# Altium PCB ZC-ST4X-A004F(4G).PcbDoc
Units mil, origin at the board's own origin, x right, y up, seen from the top; angles counter-clockwise.
Board outline 1690.91 x 2018.1 mil, 2 copper layers (Top Layer, Bottom Layer); 46 components, 33 nets, 228 pads, 167 vias.
Unrouted connection lines stored in the file: 50.
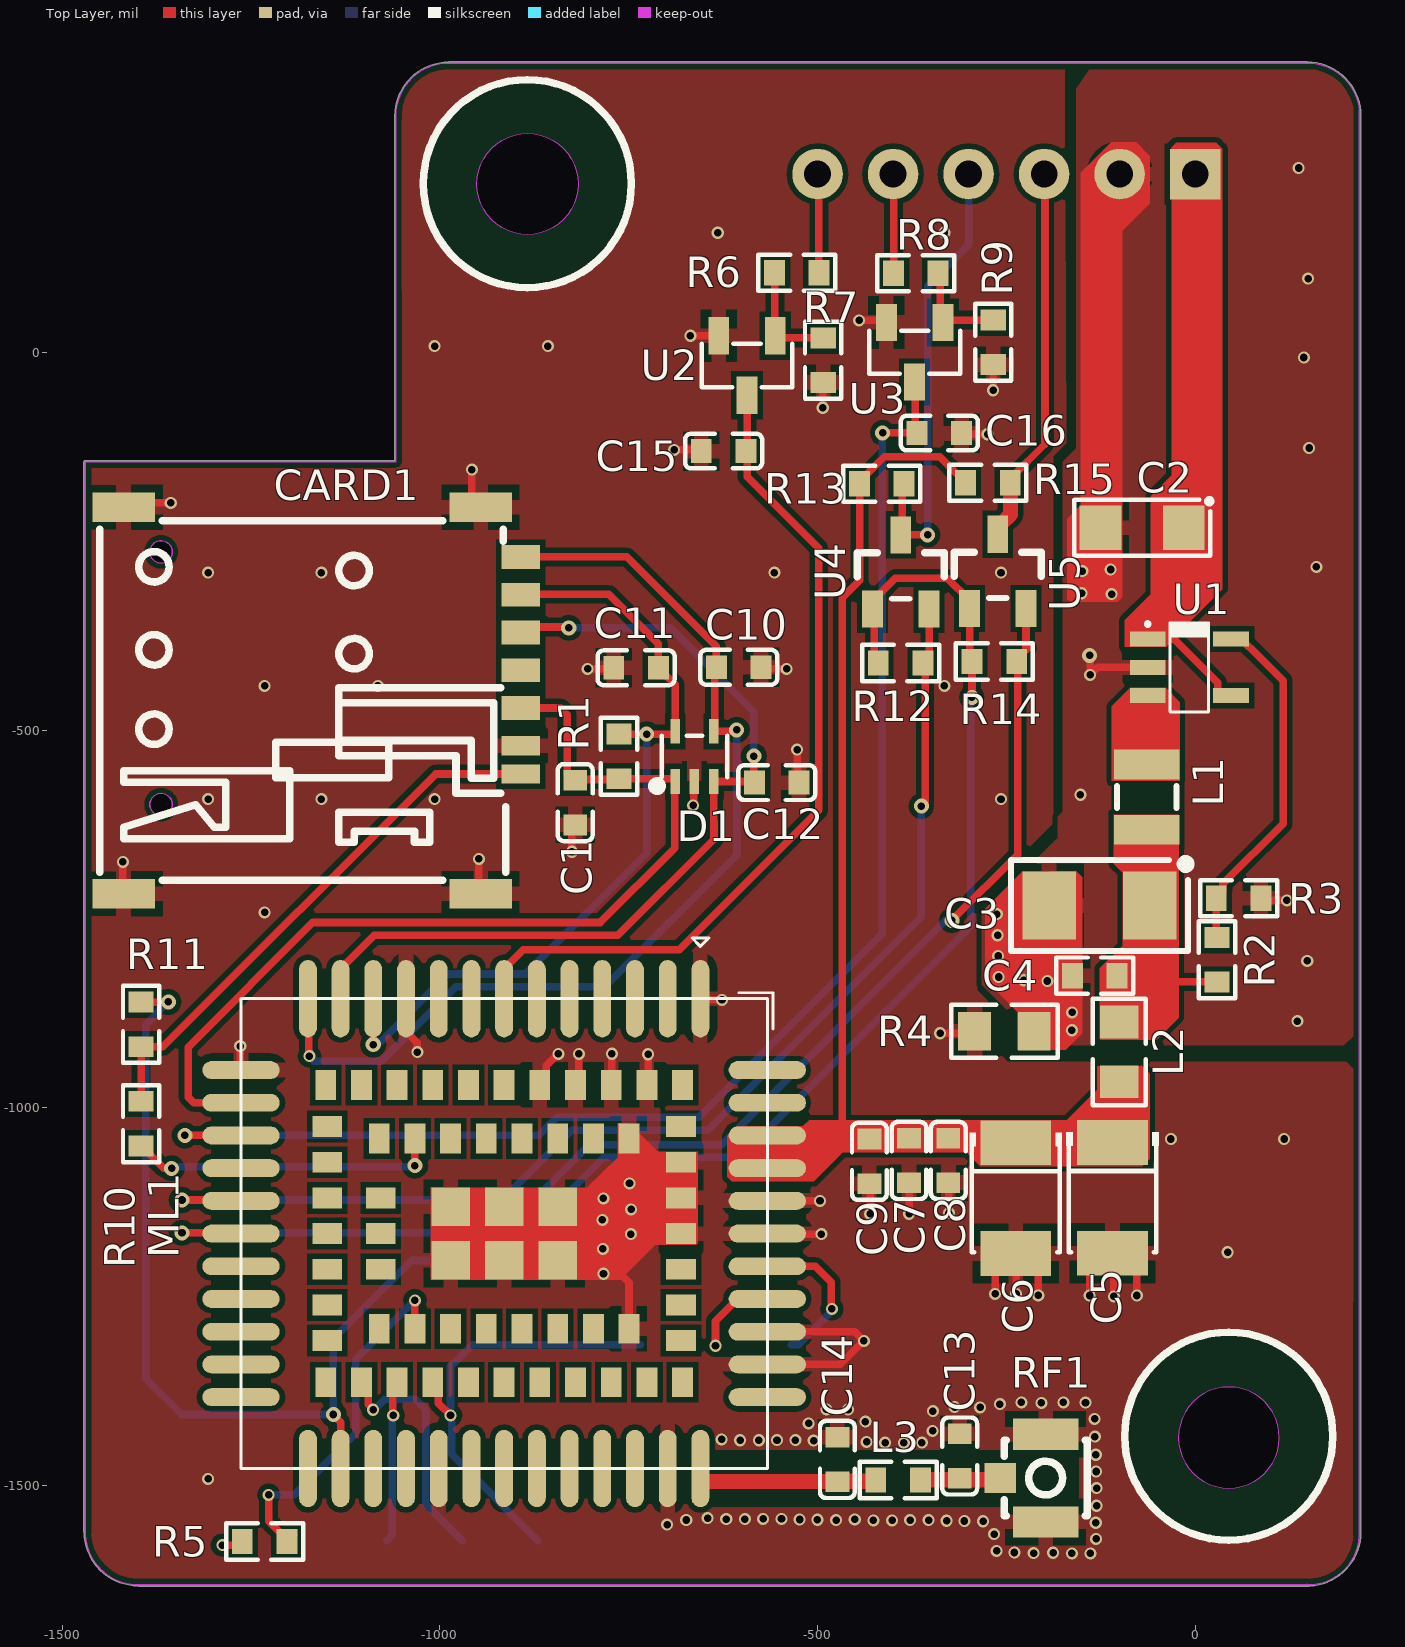
[diagram p0: Top Layer view]
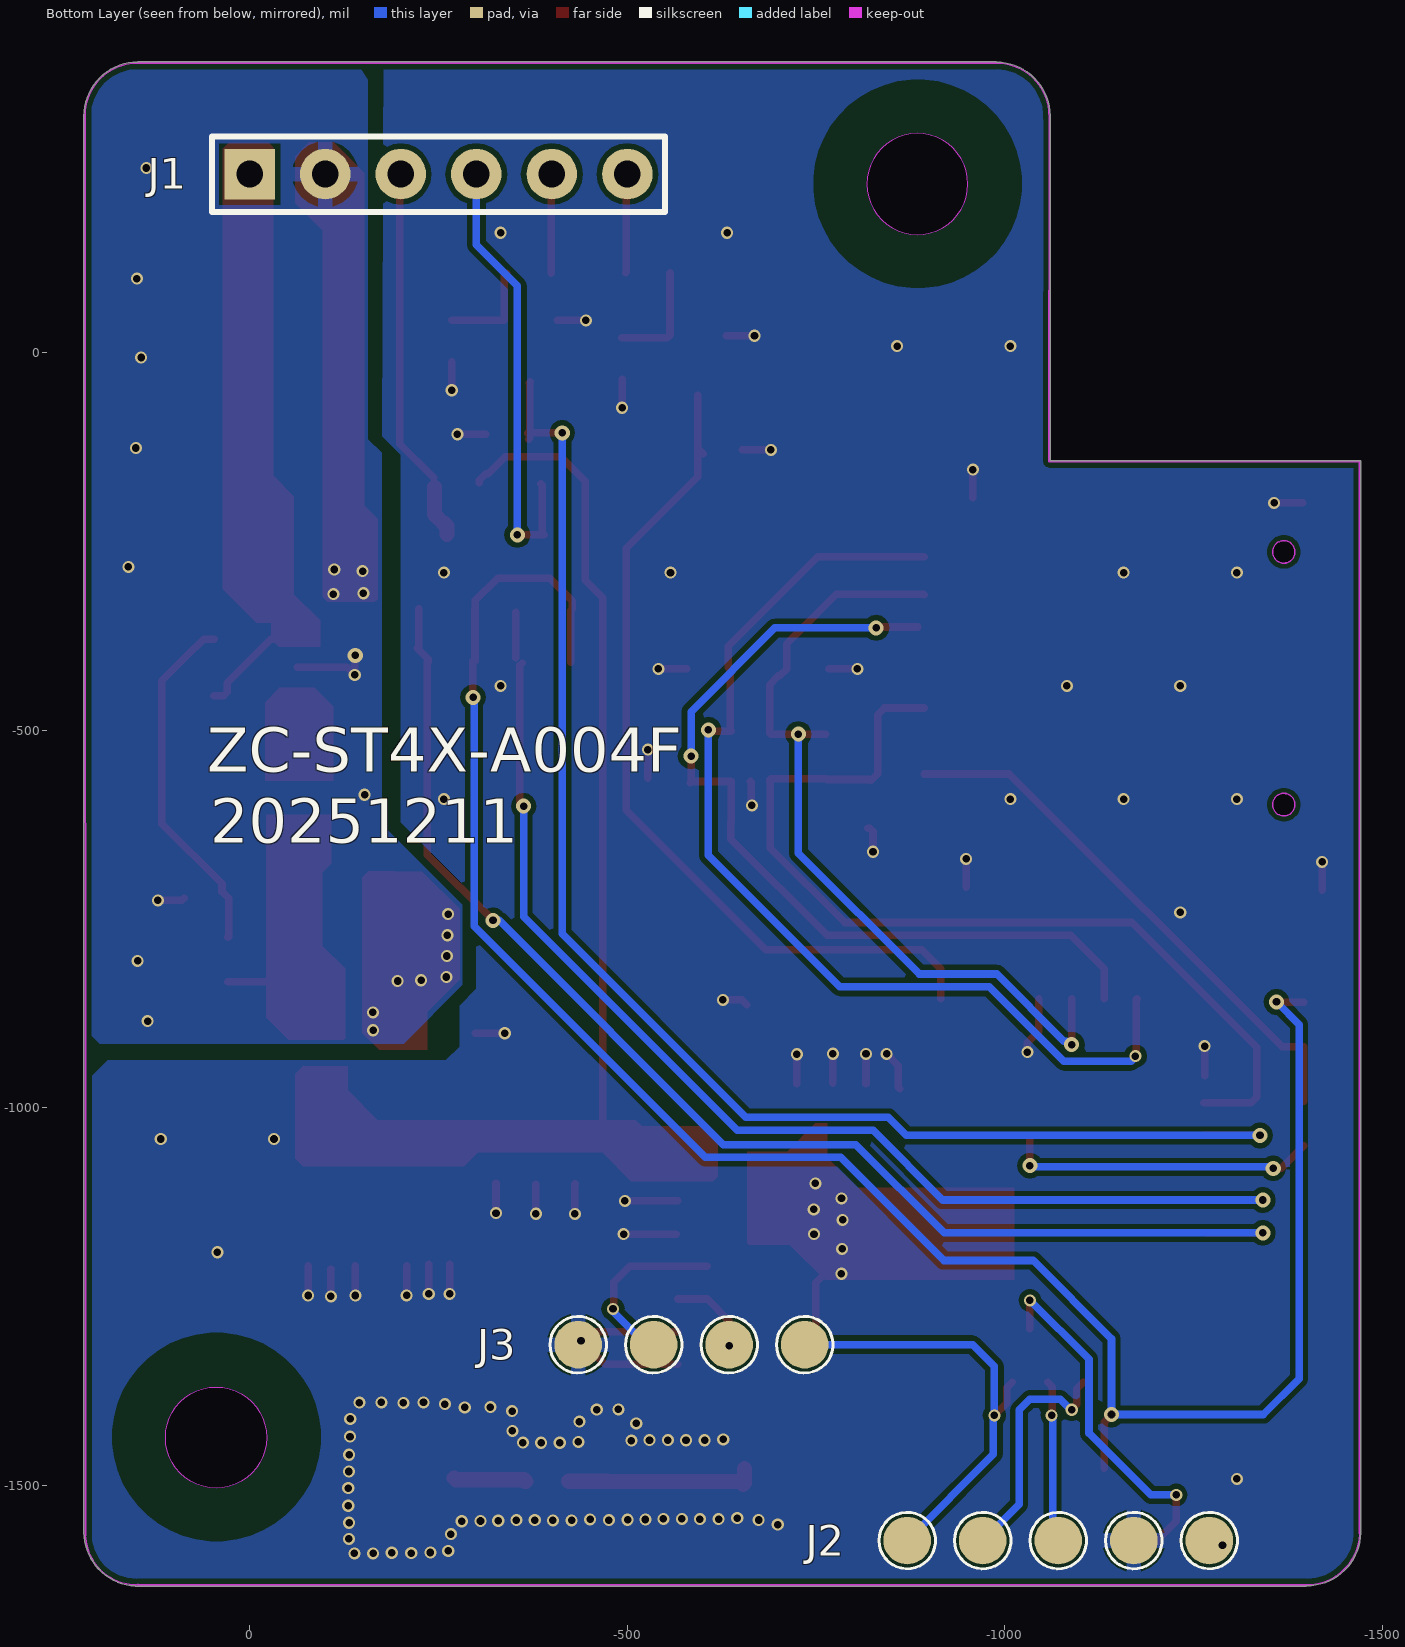
[diagram p1: Bottom Layer view, seen from below]

## Layer stack, top to bottom
Top Solder: solder mask 0.4, Solder Resist, Dk 3.5
Top Layer: signal copper 1.4
Dielectric 1: dielectric 12.6, FR-4, Dk 4.8
Bottom Layer: signal copper 1.4
Bottom Solder: solder mask 0.4, Solder Resist, Dk 3.5

## Board outline
-1399.63,-1633.11 cw(c-1399.63,-1561.6) -1471.13,-1562.79 cw(c-1469.92,-1561.92) -1471.41,-1561.92 -1471.41,-144.93 cw(c-1469.92,-144.93) -1469.36,-143.55 cw(c-1468.8,-144.93) -1468.8,-143.44 -1059.96,-143.44 -1059.96,312.95 cw(c-1058.47,312.95) -1059.81,313.6 cw(c-988.3,312.95) -989.05,384.46 cw(c-988.3,383.17) -988.3,384.66 147.98,384.66 cw(c147.98,383.17) 148.52,384.56 cw(c147.98,313.05) 219.5,313.05 cw(c217.98,313.05) 219.47,312.78 219.47,-1561.65 cw(c217.98,-1561.92) 219.5,-1561.92 cw(c147.98,-1561.92) 151.5,-1633.35 cw(c151.07,-1631.92) 151.07,-1633.41 149.82,-1633.41 cw(c147.98,-1561.92) 147.98,-1633.44 cw(c147.98,-1631.92) 147.72,-1633.41 -1398.61,-1633.41 cw(c-1398.61,-1631.92) -1399.51,-1633.11 cw(c-1399.63,-1631.6)
cut-out: -884.06,156.12 cw(c-884.06,223.05) -950.99,223.05 cw(c-884.06,223.05) -884.06,289.98 cw(c-884.06,223.05) -817.14,223.05 cw(c-884.06,223.05)
cut-out: -22.38,-1436.86 ccw(c44.55,-1436.86) 44.55,-1503.79 ccw(c44.55,-1436.86) 111.48,-1436.86 ccw(c44.55,-1436.86) 44.55,-1369.93 ccw(c44.55,-1436.86)

## Design rules (kind name [scope] priority, off if disabled: settings)
Clearance "Stitching GND" [IsStitchingVia and InNet('GND') vs (IsVia and (Not IsStitchingVia)) Or IsPad] p1: gap=5 ignorepadtopadclearanceinfootprint=FALSE
Clearance [All] p2: gap=7 ignorepadtopadclearanceinfootprint=FALSE
MinimumSolderMaskSliver [All] p1: minsoldermaskwidth=0
PlaneConnect [All] p1: planeconnectstyle=Relief reliefexpansion=20 reliefentries=4 reliefconductorwidth=40 reliefairgap=10
PolygonConnect PolygonConnect_1 [IsVia] p1: connectstyle=Direct reliefconductorwidth=10 reliefentries=4 polygonreliefangle="90 Angle" airgapwidth=10
PolygonConnect [All] p2: connectstyle=Relief reliefconductorwidth=20 reliefentries=4 polygonreliefangle="90 Angle" airgapwidth=10
RoutingVias [All] p1: holewidth=28 width=50 viastyle="Through Hole" minholewidth=28 minwidth=50 maxholewidth=28 maxwidth=50
SilkToSilkClearance [All] p1: silktosilkclearance=0
SilkToSolderMaskClearance [IsPad] p1: minsilkscreentomaskgap=0 clearancetoexposedcopper=TRUE
SolderMaskExpansion [IsVia] p1: expansion=4 istentingtop=TRUE
Width [All] p1: maxlimit=50 minlimit=10 preferedwidth=10
26 further rules are at their usual default settings.

## Components (designator, comment, footprint, x,y, rotation, side; value= is the part's Value field where it differs from the comment)
C1 "100NF" C-0603 -820.95,-596 r270 top
C2 "10UF" CA-3216 -70.28,-231.95 r180 top value=470uF
C3 "22uf" CA-3528 -126.65,-732.35 r180 top value=470uF
C4 "100NF" R-0603 -133.1,-825.15 r0 top
C5 "220uF/35V" CASE-B_3528 -109.45,-1119.45 r270 top
C6 "220UF/35V" CASE-B_3528 -237.5,-1119.8 r270 top
C7 "100NF" C-0603 -378.98,-1069.94 r90 top
C8 "10UF" C-0603 -326.85,-1069.92 r90 top
C9 "33PF" C-0603 -431.43,-1071.14 r90 top
C10 "33PF" C-0603 -604.39,-416.85 r180 top
C11 "33PF" C-0603 -740.37,-417.55 r0 top
C12 "33PF" C-0603 -554.07,-569.6 r180 top
C13 "NC" C-0603 -311.8,-1461.25 r90 top
C14 "NC" C-0603 -473.8,-1465.85 r90 top
C15 "10NF" C-0603 -624.45,-130.6 r0 top
C16 "10NF" C-0603 -338.75,-106.75 r180 top
CARD1 "SMN-303" SIM-SMD_SMN-303 -1155.8,-460.95 r270 top locked
D1 "CESDLC3V0J4" SOT-353_L2.1-W1.3-P0.65-LS2.3-BR -663.08,-534.84 r270 top
J1 "HDR2.54-LI-6P" HDR2.54-LI-6P -250,236.22 r180 bottom
J2 "HDR2.54-LI-5P" 2.54--5P -1070.6,-1573.2 r180 bottom
J3 "XH2.54-WI-4P" 2.54--4P -584.9,-1313.9 r0 bottom
L1 "2.2UH" IND-SMD_L2.5-W2.0_MHCHL2520 -64.05,-588.8 r270 top
L2 "33Ω 100MHz" R-0805 -100.6,-925.65 r270 top
L3 "0uH" R-0603 -393.38,-1492.9 r180 top
ML1 "ML307R" MOD_ML307X_LGA109P -915.03,-1166.73 r270 top locked value=ML307X
R1 "10K" R-0603 -762.95,-534.9 r270 top
R2 "1300K" R-0603 29,-804.03 r90 top value=100kΩ
R3 "240K" R-0603 57.45,-722.66 r0 top value=100kΩ
R4 "0" R-0805 -253.2,-898.65 r0 top value=100kΩ
R5 "1K" R-0603 -1232.25,-1574.55 r0 top
R6 "4.7K" R-0603 -527.48,105.6 r180 top
R7 "4.7K" R-0603 -492.65,-10.3 r90 top
R8 "4.7K" R-0603 -370,104.95 r0 top
R9 "4.7K" R-0603 -267.3,13.4 r90 top
R10 "0" R-0603 -1395.75,-1021.05 r90 top
R11 "10K" R-0603 -1395.75,-889.8 r90 top
R12 "4.7K" R-0603 -390.1,-411.25 r180 top
R13 "4.7K" R-0603 -414.9,-173.75 r180 top
R14 "4.7K" R-0603 -265.87,-409.2 r180 top
R15 "4.7K" R-0603 -274.5,-172.4 r180 top
RF1 "BWIPX-1-001E" IPEX-SMD_BWIPX-1-001E -228.02,-1490.48 r0 top
U1 "ME3120" SOT-23-5 -7.8,-416.95 r0 top
U2 "SS8050" SOT-23-3_(三极管) -593.42,-17.25 r90 top
U3 "SS8050" SOT-23-3_(三极管) -371.47,0.4 r90 top
U4 "2N7002 H6327" PG-SOT23-3_L2.9-W1.3-P1.90-LS2.4-BR -389.8,-290.7 r270 top
U5 "2N7002 H6327" PG-SOT23-3_L2.9-W1.3-P1.90-LS2.4-BR -261.4,-289.95 r270 top

## Footprints (in the part's own frame and the unit in brackets; to place one, negate y for a bottom-side part, rotate by r counter-clockwise, add the part's x,y. Pads: shape width x height; smd on the part's side, far side on the other; paste and mask are expansions set on the pad)
2.54--4P [mm] "烧录点"
  round 1.6 smd: 1(-3.81,0)
  round 1.6 smd paste-2539.97: 2(-1.27,0) 3(1.27,0) 4(3.81,0)
  silkscreen extent -4.76,-0.95 4.76,0.95
2.54--5P [mm] "烧录点"
  round 1.6 smd: 1(-5.08,0)
  round 1.6 smd paste-2539.97: 2(-2.54,0) 3(0,0) 4(2.54,0) 5(5.08,0)
  silkscreen extent -6.03,-0.95 6.03,0.95
C-0603 [mm] "贴片电容（缩小丝印层）"
  rect 0.7x0.8 smd: 1(-0.75,0) 2(0.75,0)
  silkscreen extent -1.3,-0.58 1.3,0.58, body extent -0.8,-0.41 0.8,0.41, height 0.81
CA-3216 [mm] "钽电容"
  rect 1.4x1.5 smd: 1(-1.4,0) 2(1.4,0)
  silkscreen extent -2.31,-0.94 2.29,0.94, body extent -1.6,-0.8 1.6,0.8, height 1.6
CA-3528 [mm] "钽电容"
  rect 1.8x2.3 smd: 1(-1.687,0) 2(1.687,0)
  silkscreen extent -3,-1.52 2.97,1.52, body extent -1.88,-1.46 1.82,1.47, height 2.03
CASE-B_3528 [mil] "贴片电解电容，直径8mm，高10.2mm"
  rect 59.3x93.54 smd: 1(-73.25,0) 2(73.25,0)
  silkscreen extent -87,-61 72,61
HDR2.54-LI-6P [mm] "排针，6脚"
  rect 1.7x1.7 hole 0.9: 1(-6.35,0)
  round 1.7 hole 0.9: 2(-3.81,0) 3(-1.27,0) 4(1.27,0) 5(3.81,0) 6(6.35,0)
  silkscreen extent -7.62,-1.27 7.62,1.27, body extent -7.62,-1.27 7.62,1.27, height 8.5
IND-SMD_L2.5-W2.0_MHCHL2520 [mm] "2.2UH"
  rect 1x2.2 smd paste+0.051: 1(-1.1,0) 2(1.1,0)
  silkscreen extent -0.37,-1 0.37,1
IPEX-SMD_BWIPX-1-001E [mm] "RF射频同轴连接器"
  rect 1.05x1 smd: 1(-0.763,0)
  rect 2.2x1.05 smd: 2(0.763,-1.475) 3(0.763,1.475)
  silkscreen extent -0.64,-1.27 2.16,1.27
MOD_ML307X_LGA109P [mm]
  oval 2.6x0.6 smd: 1(-7.9,6.6) 2(-7.9,5.5) 3(-7.9,4.4) 4(-7.9,3.3) 5(-7.9,2.2) 6(-7.9,1.1) 7(-7.9,0) 8(-7.9,-1.1) 9(-7.9,-2.2) 10(-7.9,-3.3) 11(-7.9,-4.4) 12(-7.9,-5.5) 13(-7.9,-6.6) 23(7.9,-6.6) 24(7.9,-5.5) 25(7.9,-4.4) 26(7.9,-3.3) 27(7.9,-2.2) 28(7.9,-1.1) 29(7.9,0) 30(7.9,1.1) 31(7.9,2.2) 32(7.9,3.3) 33(7.9,4.4) 34(7.9,5.5) 35(7.9,6.6)
  oval 0.6x2.6 smd: 14(-4.4,-8.85) 15(-3.3,-8.85) 16(-2.2,-8.85) 17(-1.1,-8.85) 18(0,-8.85) 19(1.1,-8.85) 20(2.2,-8.85) 21(3.3,-8.85) 22(4.4,-8.85) 36(4.4,8.85) 37(3.3,8.85) 38(2.2,8.85) 39(1.1,8.85) 40(0,8.85) 41(-1.1,8.85) 42(-2.2,8.85) 43(-3.3,8.85) 44(-4.4,8.85) 95(-5.5,-8.85) 96(5.5,-8.85) 97(5.5,8.85) 98(-5.5,8.85)
  rect 1x0.7 smd: 45(-5,4.8) 46(-5,3.6) 47(-5,2.4) 48(-5,1.2) 49(-5,0) 50(-5,-1.2) 51(-5,-2.4) 52(-5,-3.6) 53(-5,-4.8) 59(5,-4.8) 60(5,-3.6) 61(5,-2.4) 62(5,-1.2) 63(5,0) 64(5,1.2) 65(5,2.4) 66(5,3.6) 67(5,4.8) 73(-3.2,4.2) 74(-3.2,3) 75(-3.2,1.8) 76(-3.2,0.6) 77(-3.2,-0.6) 78(-3.2,-1.8) 79(-3.2,-3) 80(-3.2,-4.2) 81(3.2,-4.2) 82(3.2,-3) 83(3.2,-1.8) 84(3.2,-0.6) 85(3.2,0.6) 86(3.2,1.8) 87(3.2,3) 88(3.2,4.2) 99(-5,6) 100(-5,-6) 103(5,-6) 104(5,6)
  rect 0.7x1 smd: 54(-2.4,-5.95) 55(-1.2,-5.95) 56(0,-5.95) 57(1.2,-5.95) 58(2.4,-5.95) 68(2.4,5.95) 69(1.2,5.95) 70(0,5.95) 71(-1.2,5.95) 72(-2.4,5.95) 101(-3.6,-5.95) 102(3.6,-5.95) 105(3.6,5.95) 106(-3.6,5.95) 107(-1.2,-4.15) 108(0,-4.15) 109(1.2,-4.15)
  rect 1.3x1.3 smd: 89(-0.9,1.8) 90(-0.9,0) 91(-0.9,-1.8) 92(0.9,-1.8) 93(0.9,0) 94(0.9,1.8)
  silkscreen extent -9.94,-8.85 7.9,9.05, body extent -7.9,-8.85 7.9,8.85, height 2.4
PG-SOT23-3_L2.9-W1.3-P1.90-LS2.4-BR [mm]
  rect 1.25x0.7 smd paste+0 mask+0.051: 1(1.25,-0.95) 2(1.25,0.95) 3(-1.25,0)
  silkscreen extent -0.65,-1.46 0.9,1.46
R-0603 [mm] "贴片电阻（缩小丝印层）"
  rect 0.7x0.85 smd: 1(-0.75,0) 2(0.75,0)
  silkscreen extent -1.3,-0.61 1.3,0.61, body extent -0.77,-0.4 0.83,0.4, height 0.45
R-0805 [mm] "贴片电阻（封装缩小丝印层）"
  rect 1.1x1.3 smd: 1(-0.991,0) 2(1.016,0)
  silkscreen extent -1.78,-0.89 1.8,0.89, body extent -0.99,-0.63 1.01,0.63, height 0.55
SIM-SMD_SMN-303 [mm]
  rect 1x2.1 smd: 8(-6.5,5.328) 9(6.5,5.328) 10(6.5,-6.672) 11(-6.5,-6.672)
  rect 0.8x1.3 smd: C1(0.25,6.672) C2(-2.29,6.672) C3(-4.83,6.672) C6(-1.02,6.672) C7(-3.56,6.672)
  rect 0.65x1.3 smd: C5(1.52,6.672) CD(2.47,6.672)
  Keep-Out Layer board cut-out: -4.625,-5.422 -4.625,-5.497 -4.682,-5.635 -4.787,-5.74 -4.925,-5.797 -5.074,-5.797 -5.212,-5.74 -5.318,-5.635 -5.375,-5.497 -5.375,-5.422 -5.375,-5.348 -5.318,-5.21 -5.212,-5.104 -5.074,-5.047 -4.925,-5.047 -4.787,-5.104 -4.682,-5.21 -4.625,-5.348 -4.625,-5.422
  Keep-Out Layer board cut-out: 3.875,-5.422 3.875,-5.497 3.818,-5.635 3.712,-5.74 3.575,-5.797 3.425,-5.797 3.288,-5.74 3.182,-5.635 3.125,-5.497 3.125,-5.422 3.125,-5.348 3.182,-5.21 3.288,-5.104 3.425,-5.047 3.575,-5.047 3.712,-5.104 3.818,-5.21 3.875,-5.348 3.875,-5.422
  Keep-Out Layer circle w0.025: c-5,-5.422 r0.375
  Keep-Out Layer circle w0.025: c3.5,-5.422 r0.375
  Keep-Out Layer region: -4.625,-5.422 -4.625,-5.497 -4.682,-5.635 -4.787,-5.74 -4.925,-5.797 -5.074,-5.797 -5.212,-5.74 -5.318,-5.635 -5.375,-5.497 -5.375,-5.422 -5.375,-5.348 -5.318,-5.21 -5.212,-5.104 -5.074,-5.047 -4.925,-5.047 -4.787,-5.104 -4.682,-5.21 -4.625,-5.348 -4.625,-5.422
  Keep-Out Layer region: 3.875,-5.422 3.875,-5.497 3.818,-5.635 3.712,-5.74 3.575,-5.797 3.425,-5.797 3.288,-5.74 3.182,-5.635 3.125,-5.497 3.125,-5.422 3.125,-5.348 3.182,-5.21 3.288,-5.104 3.425,-5.047 3.575,-5.047 3.712,-5.104 3.818,-5.21 3.875,-5.348 3.875,-5.422
  silkscreen extent -6.04,-7.49 6.04,6.16
SOT-23-3_(三极管) [mm]
  rect 1.25x0.7 smd: 1(1,-0.95) 2(1,0.95) 3(-1,0)
  silkscreen extent -0.73,-1.53 0.73,1.53, body extent -1.2,-1.5 1.2,1.5, height 1.05
SOT-23-5 [mm] "3x1.6x1.1mm(长宽高)"
  rect 1.2x0.5 smd: 1(-1.4,0.95) 2(-1.4,0) 3(-1.4,-0.95) 4(1.4,-0.95) 5(1.4,0.95)
  silkscreen extent -1.45,-1.5 0.64,1.51, body extent -1.4,-1.5 1.4,1.5, height 1.15
SOT-353_L2.1-W1.3-P0.65-LS2.3-BR [mm]
  rect 0.839x0.315 smd: 1(0.844,-0.65) 2(0.844,0) 3(0.844,0.65) 4(-0.844,0.65) 5(-0.844,-0.65)
  silkscreen extent -0.7,-1.41 1.15,1.1

## Part data
C1 C4 C7 C8 C9 C10 C11 C12 C13 C14 C15 C16: library part "0603' 100pF 5% 50V NP0 车规", "贴片电容", 华芯物料编号=HXE0202045001, 厂商型号=AC0603JRNPO9BN101, 品牌=国巨
C2 C3: library part KF470M050E110A, JLCPCB Part Class=扩展库, LCSC Part Name="47uF ±20% 50V", Lifetime @ Temp=2000hrs@105℃, Manufacturer=CapXon(丰宾), Rated Voltage=50V, Tolerance=±20%, Add into BOM=yes, Convert to PCB=yes, Datasheet=https://atta.szlcsc.com/upload/public/pdf/source/20160702/1467448308274.pdf, Device=KF470M050E110A, L=11mm, Lead Spacing=2.5mm, Manufacturer Part=KF470M050E110A, Name=10UF, Supplier=LCSC, Supplier Footprint=插件,D6.3xL11mm, Supplier Part=C59347, Symbol=KF470M050E110A, φD=6.3mm
C5 C6: library part C电解电容_1, "电容"
CARD1: JLCPCB Part Class="Extended Part", LCSC Part Name="自弹式 NanoSIM卡 卡座", Manufacturer=XUNPU(讯普), Operating Temperature=-40℃~+85℃, Add into BOM=yes, Card Connection Mode=自弹式, Card Detection=有插卡检测, Card Type=NanoSIM卡, Connector Type=卡座, Convert to PCB=yes, Datasheet=https://item.szlcsc.com/datasheet/SMN-303/256999.html, Device=SMN-303, Height Above Board=1.37mm, Manufacturer Part=SMN-303, Supplementary Features=-, Supplier=LCSC, Supplier Footprint=SMD, Supplier Part=C266888, Symbol=SMN-303
D1: Breakdown Voltage=5.3V, JLCPCB Part Class="Extended Part", LCSC Part Name=单向ESD, Manufacturer=CJ(江苏长电/长晶), Maximum Clamping Voltage=8V, Peak Pulse Current (Ipp)@10/1000us=2.5A, Reverse Stand-Off Voltage (Vrwm)=3V, Add into BOM=yes, Convert to PCB=yes, Datasheet=https://atta.szlcsc.com/upload/public/pdf/source/20181121/C337697_AC0D153A44294AFEE34B0495F85181F2.pdf, Device=CESDLC3V0J4, Manufacturer Part=CESDLC3V0J4, polarity=单向, Supplier=LCSC, Supplier Footprint=SOT-353, Supplier Part=C337697, Symbol=CESDLC3V0J4, Type=ESD
J1: library part HDR2.0-LI-6P, "直插立式单排针"
J2: "直插立式单排针"
J3: "XH卧式直插座"
L1: library part FTC252012S2R2MBCA, Symbol=FTC252012S2R2MBCA
L2: library part "0603' 33Ω 100MHz 3A 车规", "磁珠", 华芯物料编号=HXE0301100005, 厂商型号=BLM18PG330SH1D, 品牌=村田
L3: library part 通用电感, "通用电感"
ML1: library part MOD_ML307X_LGA109P, "MOD_ML307R_LCC48+LGA61_17.7mm*15.8mm", Manufacturer=ML307X, PCB DECAL=MOD_ML307X_LGA109P, Vendor=中移物联网有限公司
R1: library part 通用电阻
R2 R3 R4: library part 0805W8F1002T5E_C17414, "电阻类型:厚膜电阻;阻值:0", JLCPCB Part Class=BasicPart, LCSC Part Name=10kΩ±1%125mW, Manufacturer=UNI-ROYAL(厚声), Manufacturer Part=0805W8F1002T5E, Operating Temperature Range=-55℃~+155℃, Overload Voltage (Max)=150V, Power(Watts)=125mW, Temperature Coefficient=±100ppm/℃, Tolerance=±1%, Add into BOM=yes, Convert to PCB=yes, Datasheet=https://atta.szlcsc.com/upload/public/pdf/source/20200306/C422600_1E6D84923E4A46A82E41ADD87F860B5C.pdf, Device=0805W8F1002T5E_C17414, Name=0, Supplier=LCSC, Supplier Footprint=0805, Supplier Part=C17414, Symbol=0805W8F1002T5E, Type=厚膜电阻
R5 R6 R7 R8 R9 R10 R11 R12 R13 R14 R15: library part 通用电阻, "贴片电阻，未编号，未录入华芯元件库，临时封装，包括0201，0402，0603，0805，1206，1210，1812，2010，2512"
RF1: Frequency-Max=6GHz, JLCPCB Part Class="Extended Part", LCSC Part Name="IPEX 内针", Manufacturer="BAT WIRELESS(蝙蝠无线)", Operating Temperature Range=-, Add into BOM=yes, Connector Type=板端, Convert to PCB=yes, Datasheet=https://atta.szlcsc.com/upload/public/pdf/source/20201223/C496552_05E5A9956EAE1A8819C5051D085B1DED.pdf, Device=BWIPX-1-001E, Impedance=50Ω, Interface Diameter=-, Interface Length/Height=-, Interface Type=内针, Manufacturer Part=BWIPX-1-001E, Number of Ports=1, RF Series=IPEX, Style=-, Supplier=LCSC, Supplier Footprint=SMD, Supplier Part=C496552, Symbol=BWIPX-1-001E
U1: "电源芯片", 华芯物料编号=HXE0003027001, 厂商型号=MT3410LB, 品牌=西安航天民芯
U2 U3: library part "SS8050 NPN SOT-23", Collector Current (Ic)=1.5A, Collector Cut-Off Current (Icbo)=100nA, Collector-Emitter Breakdown Voltage (Vceo)=25V, Collector-Emitter Saturation Voltage (VCE(sat)@Ic,Ib)=500mV@800mA,80mA, DC Current Gain (hFE@Ic,Vce)=120@100mA,1.0V, JLCPCB Part Class="Extended Part", LCSC Part Name="耐压:25V 电流:1.5A NPN H档 200-350", Manufacturer=宏迦橙, Operating Temperature=-55℃~+150℃, Power Dissipation (Pd)=300mW, Transition Frequency (fT)=100MHz, Add into BOM=yes, Convert to PCB=yes, Datasheet=https://atta.szlcsc.com/upload/public/pdf/source/20231222/9C4050A7669EB24B3ACD0418218817FD.pdf, Device=SS8050_C7420370, Manufacturer Part=SS8050, Name=SS8050, Supplier=LCSC, Supplier Footprint=SOT-23, Supplier Part=C7420370, Symbol=SS8050_C7420370, Transistor Type=NPN
U4 U5: JLCPCB Part Class="Extended Part", Manufacturer=Infineon(英飞凌), Add into BOM=yes, Convert to PCB=yes, Datasheet=https://atta.szlcsc.com/upload/public/pdf/source/20220830/BD30B6441EBE5CA0CCBEB0FC11431461.pdf, Device="2N7002 H6327", LCSC Part Name="2N7002 H6327", Manufacturer Part="2N7002 H6327", Supplier=LCSC, Supplier Footprint=SOT-23-3, Supplier Part=C533095, Symbol="2N7002 H6327"

## Via types
v1: diameter 16, hole 10, Top Layer to Bottom Layer, tented both sides, 149 vias
v2: diameter 20, hole 10, Top Layer to Bottom Layer, tented both sides, 18 vias

## Nets (pads, with @x,y where several pads share a name; then routed paths per layer and width w, separated by ;. In a path a pad name is that pad's centre, name@x,y a point inside that pad or via, vN(x,y) a via of type N, cw(c..) or ccw(c..) an arc to the next point about the centre after c; other vN are vias at no path point)
+5V: C2.1 J1.1 U1.1 U1.4 | length 148.5
  Top Layer w10: U1.1 -27.65,-379.55 29.9,-437.1 29.9,-449.51 34.74,-454.35 U1.4
ANT: C14.1 L3.2 ML1.35 | length 256.6
  Top Layer w20: ML1.35 -655.18,-1497.08 -653.51,-1498.75 -653.51,-1494.85 C14.1@-473.8,-1494.85 ; C14.1@-473.8,-1494.75 L3.2@-422.46,-1494.75
DBG_RXD: J3.2 ML1.38 | length 113.4
  Top Layer w10: v1(-635.2,-1315.3) -635.2,-1282.57 -605.97,-1253.34 ML1.38
DBG_TXD: J3.3 ML1.39 | length 243.7
  Top Layer w10: ML1.39@-605.97,-1210.04 -503.36,-1210.04 -482.15,-1231.25 -482.15,-1265.4 v1(-481,-1266.55)
  Bottom Layer w10: J3.3 -525.27,-1313.9 -481,-1269.63 v1(-481,-1266.55)
GND: C2.2 C3.2 C4.1 J1.2 R3.2 R4.2 U1.2 | length 276.6
  Top Layer w10: v1(-150.5,-318.8) -112,-318.8 v1(-110.7,-320.1) -110.7,-246.65 C2.2 ; v2(-139.7,-401.1) -139.05,-401.75 v1(-139.05,-426.9) -129.1,-416.95 U1.2 ; R3.2 89.87,-725.55 v1(121.5,-725.55)
  other v1: -163.35,-897.5 135.3,-885.45 -163,-873.75 -195.8,-832.3 -226.9,-831.3 -260.35,-826.95 148.35,-805.65 -261,-799.15 -261.7,-771.75 -262.7,-743.65 -152.05,-585.7 -149.5,-289.65 -111.95,-287.4 160.6,-284 150.85,-126.5 143.85,-6.65 149.45,97.9 136.9,244.25
MCU_MAIN_RXD: J1.3 R15.1 U5.3 | length 491
  Top Layer w10: R15.1@-243.55,-165.9 -198.87,-121.22 J1.3@-198.87,236.22
  Top Layer w20: U5.3 -261.4,-229.92 -257.62,-226.14 -256.22,-226.14 -244.5,-214.43 R15.1@-244.5,-178.2
MCU_MAIN_TXD: J1.4 R13.1 U4.3 | length 605.3
  Top Layer w10: R13.1 -387.59,-175.96 -387.59,-239.29 U4.3 v2(-354.35,-241.5)
  Bottom Layer w10: v2(-354.35,-241.5) -354.35,88.45 -300,142.8 J1.4
ML307R-BOOT_MODE: ML1.82 R5.2 | length 479.7
  Top Layer w10: v1(-1226.8,-1512.8) -1226.8,-1547.52 -1202.72,-1571.6 R5.2 R5.2@-1193.72,-1565.55 ; ML1.82 v1(-1033.14,-1255.16)
  Bottom Layer w10: v1(-1226.8,-1512.8) -1193,-1512.8 -1111.35,-1431.15 -1111.35,-1333.38 v1(-1033.14,-1255.16)
ML307R-PWR: J1.6 R6.1 | length 132
  Top Layer w10: J1.6@-498.87,237.2 -498.41,236.74 -498.41,106.06 R6.1
ML307R-RESET: J1.5 R8.1 | length 132.5
  Top Layer w10: R8.1 -399.2,105.28 -399.2,236.87 J1.5@-398.87,237.2
NetC3_1: C3.1 C4.2 L1.2 L2.1 R2.1 | length 66.8
  Top Layer w10: C4.2@-113.24,-817.65 C4.2@-105.04,-825.85 ; -26.24,-833.56 R2.1
NetC13_1: C13.1 L3.1 RF1.1 | length 98.7
  Top Layer w20: L3.1@-363.85,-1494.85 -365.8,-1494.85 L3.1 ; L3.1@-363.85,-1492.73 -272.9,-1492.73 RF1.1@-270.77,-1490.6
NetC15_2: C15.2 ML1.7 U2.3 | length 1155.4
  Top Layer w10: ML1.7 -915.03,-816.33 -889.54,-790.85 -683.2,-790.85 -498.45,-606.1 -498.45,-259.25 -593.42,-164.28 -593.42,-130.6 -593.42,-113.53 ; C15.2@-600.6,-134.1 -593.42,-126.92 -593.42,-113.53 ; U2.3 -593.42,-113.53
NetC16_2: C16.2 ML1.15 U3.3 | length 1893
  Top Layer w10: v2(-1337.76,-1036.81) ML1.15 ; v2(-413.8,-106.4) -368.63,-106.4 C16.2 ; U3.3 U3.3@-369.9,-40.54 ; U3.3@-370.85,-42.29 -370.85,-113.58 C16.2@-369.63,-114.8
  Bottom Layer w10: v2(-1337.76,-1036.81) -869.51,-1036.81 -845.45,-1012.75 -657.05,-1012.75 -414.1,-769.8 -414.1,-106.7 v2(-413.8,-106.4)
NetJ2_5: J2.5 R5.1 | length 78.2
  Top Layer w10: v1(-1288.1,-1579.25) -1266.48,-1579.25 R5.1
  Bottom Layer w10: J2.5@-1270.6,-1566.62 J2.5 ; J2.5 J2.5@-1267.31,-1569.91 ; J2.5 J2.5@-1261.3,-1563.89 ; J2.5@-1267.31,-1569.91 J2.5@-1261.3,-1563.89 ; J2.5@-1267.31,-1569.91 J2.5@-1261.3,-1563.89 ; J2.5@-1267.31,-1569.91 J2.5@-1261.3,-1563.89
NetL1_1: L1.1 U1.3
NetML1_79: ML1.79 R10.1 | length 412.4
  Top Layer w10: R10.1 -1366.03,-1080.3 v2(-1355.25,-1080.3) ; v2(-1033.14,-1076.76) ML1.79
  Bottom Layer w10: v2(-1355.25,-1080.3) -1353.48,-1078.53 -1034.9,-1078.53 v2(-1033.14,-1076.76)
NetR2_2: R2.2 R3.1 U1.5 | length 468.8
  Top Layer w10: R2.2 27.92,-773.42 R3.1 36.7,-713.88 36.7,-703.5 116.35,-623.85 116.35,-434.55 83.5,-401.7 83.24,-401.7 61.1,-379.55 U1.5
NetR6_2: R6.2 R7.2 U2.1 | length 148.5
  Top Layer w10: R6.2 -556.51,105.11 -556.51,22.61 U2.1 -553.13,19.23 R7.2
NetR8_2: R8.2 R9.2 U3.1 | length 133.3
  Top Layer w10: R8.2 -337.27,101.75 -337.27,42.97 -337.23,42.93 R9.2
NGND: C1.2 C5.2 C6.2 C7.1 C8.1 C9.1 C10.1 C11.1 C12.1 C13.2 C14.2 C15.1 C16.1 CARD1.8 CARD1.9 CARD1.10 CARD1.11 CARD1.C5 D1.2 J2.4 J3.4 ML1.1 ML1.10 ML1.27 ML1.34 ML1.36 ML1.37 ML1.40 ML1.41 ML1.45 ML1.46 ML1.47 ML1.48 ML1.70 ML1.71 ML1.72 ML1.73 ML1.88 ML1.89 ML1.90 ML1.91 ML1.92 ML1.93 ML1.94 ML1.95 R4.1 R7.1 R9.1 RF1.2 RF1.3 U2.2 U3.2 | length 1777.8
  Top Layer w10: CARD1.10@-1419.95,-712.12 v1(-1419.95,-674.55) ; CARD1.11@-1394.02,-199.1 v1(-1356.45,-199.1) ; ML1.95@-1264.45,-957.83 v1(-1264.45,-918.6) ; ML1.10 -1044.95,-898.76 -1029.8,-913.91 v1(-1029.8,-926.4) ; CARD1.8@-957.65,-192.62 v1(-957.65,-155.05) ; CARD1.9@-948.6,-708.17 v1(-948.6,-670.6) ; ML1.48@-860.5,-974.73 -859,-973.23 -859,-944.65 v1(-843.25,-928.9) ; v1(-825.29,-661.16) -825.29,-634.31 -821.22,-630.23 C1.2@-818.65,-630.23 ; ML1.47@-816,-968.13 v1(-816,-928.9) ; v1(-804.55,-419) C11.1@-766.98,-419 ; -775.35,-1206.45 -749.67,-1232.13 ML1.88 ; ML1.46@-772.3,-967.88 v1(-772.3,-928.65) ; ML1.45@-724.45,-968.48 v1(-724.45,-929.25) ; v1(-690,-129.05) C15.1@-652.43,-129.05 ; v1(-668.38,22.12) U2.2 ; v1(-664.87,-599.79) -663.97,-598.89 -663.97,-568.98 D1.2 ; ML1.1@-657.92,-863.45 -651.73,-857.26 v1(-626.54,-857.26) ; C10.1@-578.67,-419 v1(-541.1,-419) ; ML1.36 -469.91,-1339.96 v1(-438.65,-1308.7) -450.7,-1296.65 ML1.37 ; ML1.41 v1(-496.82,-1123.42) ; ML1.40@-564.83,-1167.5 v1(-495.05,-1167.5) ; C12.1@-527.2,-563.52 v1(-527.2,-525.95) ; v1(-493.2,-73.25) R7.1@-493.2,-35.68 ; v1(-445,42.4) U3.2@-407.43,42.4 ; C9.1@-431.3,-1100.67 -430.5,-1101.47 v1(-430.5,-1140.7) ; v1(-378.9,-1140.45) C7.1@-378.9,-1101.22 ; v1(-337.7,-901.5) R4.1@-298.47,-901.5 ; v1(-326.1,-1139.55) C8.1@-326.1,-1100.32 ; C16.1@-312.42,-108.35 v1(-274.85,-108.35) ; v1(-267.5,-50) R9.1@-267.5,-12.43 ; v1(-264.8,-1246.55) C6.2@-264.8,-1207.32 ; v1(-237.05,-1246.55) C6.2@-237.05,-1207.32 ; v1(-207.8,-1248.45) C6.2@-207.8,-1209.22 ; v1(-139.85,-1248.75) C5.2@-139.85,-1209.52 ; C5.2@-107.9,-1213.67 -107.55,-1214.02 v1(-107.55,-1250) ; v1(-77.2,-1248.75) C5.2@-77.2,-1209.52
  other v1: -163.35,-1590.15 -138.65,-1590.15 -239.3,-1589.05 -213.85,-1589.8 -188.05,-1589.4 -262.9,-1586.85 -131.25,-1571 -266.25,-1564.7 -699.15,-1552.15 -131.65,-1549.6 -329.05,-1547 -305.55,-1547.3 -280.8,-1547.7 -673.85,-1546 -475.55,-1546.05 -426.15,-1546.4 -401.4,-1546.4 -377.4,-1546.2 -353.05,-1546.2 -523.8,-1545.35 -500.3,-1545.65 -450.75,-1545.25 -620.9,-1544.75 -596.15,-1544.75 -572.15,-1544.55 -547.8,-1544.55 -645.5,-1543.6 -130.5,-1527.1 -130.5,-1503.85 -1307.13,-1491.49 -131.25,-1481.75 -131.65,-1459.6 -410.55,-1443.65 -385.8,-1443.65 -361.8,-1443.45 -435.15,-1442.5 -505.35,-1441 -602.45,-1440.4 -577.7,-1440.4 -553.7,-1440.2 -529.35,-1440.2 -627.05,-1439.25 -132.75,-1435.65 -347.75,-1427.9 -511.85,-1417.95 -436.6,-1415.7 -133.1,-1412.05 -347.35,-1401.7 -488.25,-1399.5 -459.5,-1399.85 -318.6,-1396.55 -284.7,-1396.9 -258.5,-1392.5 -203.55,-1391 -230.1,-1390.25 -174.4,-1390.25 -145.25,-1390.65 -783.5,-1219.9 42.87,-1191.49 -784.35,-1187 -747.2,-1167.4 -785.05,-1148.7 -746.85,-1134.65 -783.6,-1120.05 -749.05,-1100.3 -32.13,-1041.49 117.87,-1041.49 -1232.13,-741.49 -1307.13,-591.49 -1157.13,-591.49 -1007.13,-591.49 -257.13,-591.49 -1232.13,-441.49 -1082.13,-441.49 -332.13,-441.49 -1307.13,-291.49 -1157.13,-291.49 -557.13,-291.49 -257.13,-291.49 -1007.13,8.51 -857.13,8.51 -632.13,158.51 -332.13,158.51
UART0_RXD: ML1.17 R12.1 U4.2 | length 1609.3
  Top Layer w10: v2(-1341.6,-1122.3) ML1.17@-1266.23,-1122.3 ; v2(-362.65,-600.65) -357.6,-595.6 -357.6,-414.22 R12.1 ; R12.1@-352.1,-404.23 U4.2@-352.1,-343.75
  Bottom Layer w10: v2(-1341.6,-1122.3) -917.9,-1122.3 -825.35,-1029.75 -645.5,-1029.75 -362.65,-746.9 v2(-362.65,-600.65)
UART0_TXD: ML1.18 R14.1 U5.2 | length 1718
  Top Layer w10: v2(-1341.6,-1165.75) ML1.18@-1266.23,-1165.75 ; v2(-322.15,-751.95) -235.1,-664.9 -235.1,-410.45 R14.1 ; R14.1@-236.34,-406.25 -221.62,-391.53 ; -224,-390.78 U5.2
  Bottom Layer w10: v2(-1341.6,-1165.75) -919.45,-1165.75 -802.55,-1048.85 -627,-1048.85 -330.1,-751.95 v2(-322.15,-751.95)
USB_DN: J2.3 ML1.60 | length 216.3
  Top Layer w10: v1@-1062.5,-1408.07 -1062.5,-1369.32 ML1.60
  Bottom Layer w10: J2.3 -1063.05,-1565.65 -1063.05,-1408.5 v1(-1061.9,-1407.35)
USB_DP: J2.2 ML1.59 | length 317.3
  Top Layer w10: ML1.59 -1095.22,-1372.36 -1095.22,-1392.43 v1@-1088.05,-1399.6
  Bottom Layer w10: v1(-1088.5,-1400.05) -1087.35,-1400.05 -1073.2,-1385.9 -1032.8,-1385.9 -1018.8,-1399.9 -1018.8,-1525 J2.2
USIM_CLK: C10.2 CARD1.C3 D1.4 ML1.13 | length 1377.9
  Top Layer w10: ML1.13 -1173.84,-856.73 -1173.84,-930.74 v1(-1172.82,-931.76) ; CARD1.C3 -752.4,-270.8 -633.92,-389.28 C10.2 -636.29,-419.22 -636.29,-500.4 D1.4 -609.1,-501.6 v2(-607.3,-499.8)
  Bottom Layer w10: v1(-1172.82,-931.76) -1172.82,-932.74 -1166.96,-938.6 -1077.8,-938.6 -979.25,-840.05 -781.55,-840.05 -607.3,-665.8 v2(-607.3,-499.8)
USIM_DATA: C11.2 CARD1.C7 D1.5 ML1.11 R1.1 | length 1098.8
  Top Layer w10: v2(-1088.4,-916.6) -1088.33,-916.53 -1088.33,-855.78 ML1.11 ; CARD1.C7 -892.48,-320.15 -776.4,-320.15 -710.84,-385.71 C11.2 -710.84,-419.52 -702.06,-428.3 -700.09,-428.3 -688.67,-439.72 D1.5 -688.67,-504.17 -689.87,-505.37 v2(-726.41,-505.37) R1.1
  Bottom Layer w10: v2(-1088.4,-916.6) -1085.69,-916.6 -1080.94,-911.85 -1077.8,-911.85 -988.95,-823 -886.55,-823 -726.41,-662.86 v2(-726.41,-505.37)
USIM_DET: CARD1.CD R10.2 R11.1 | length 724.4
  Top Layer w10: R10.2 R11.1 -1366.93,-919.33 -1005.8,-558.19 CARD1.CD
USIM_PWR: C1.1 CARD1.C1 D1.1 ML1.14 R1.2 | length 1273.5
  Top Layer w10: ML1.14 -1326.3,-993.5 -1333.6,-986.2 -1333.6,-920.2 -1168.2,-754.8 -787.6,-754.8 -689.77,-656.97 ; CARD1.C1 -840.35,-470.8 -831.7,-479.45 -831.7,-557.69 -822.92,-566.47 C1.1 -819.93,-565.45 -763.97,-565.45 R1.2 -689.87,-564.43 -688.67,-565.63 D1.1 -689.08,-568.5 -689.08,-655.63
USIM_RST: C12.2 CARD1.C2 D1.3 ML1.12 | length 1175.6
  Top Layer w10: ML1.12 -1131.56,-816.33 -1087.03,-771.8 -764.6,-771.8 -637.15,-644.35 -637.15,-621.3 ; CARD1.C2@-884.5,-363.55 -830.5,-363.55 v2(-829.43,-364.62) ; -637.49,-621.3 D1.3 -585.12,-568.08 C12.2@-584.35,-568.85 ; v2(-584.35,-534.55) C12.2@-584.35,-568.85 ; C12.2 C12.2@-584.35,-568.85
  Bottom Layer w10: v2(-829.43,-364.62) -695.32,-364.62 -584.35,-475.6 v2(-584.35,-534.55)
VBAT: C5.1 C6.1 C7.2 C8.2 C9.2 L2.2 ML1.42 ML1.43 R13.2 R15.2 | length 1044.8
  Top Layer w10: -467.4,-1036.15 -467.4,-324.74 -444.43,-301.77 R13.2 -444.43,-170.8 -411.63,-138 -338.43,-138 -315.76,-160.67 -312.81,-160.67 -304.03,-169.45 R15.2
VCC_5V: J2.1 J3.1 ML1.61 | length 595.1
  Top Layer w10: ML1.61 -1002.38,-1370.71 -1002.38,-1391.12 v1(-986.05,-1407.45)
  Bottom Layer w10: J2.1 -984.6,-1459.2 -984.6,-1413.14 -984.9,-1412.84 -984.9,-1408.6 v1(-986.05,-1407.45) -986.05,-1342.5 -957.45,-1313.9 J3.1
VDD_EXT: ML1.24 R11.2 R12.2 R14.2 U4.1 U5.1 | length 2725
  Top Layer w10: R11.2 -1359.82,-860.27 v2(-1359.6,-860.05) ; v2(-1141.1,-1406.3) -1141.1,-1407.24 -1131.56,-1416.78 ML1.24 ; U4.1 -427.2,-329.07 -397.03,-298.9 -328.22,-298.9 -298.8,-328.32 U5.1 ; R12.2@-425.15,-410.5 U4.1@-425.15,-341.92 ; R14.2@-298.29,-407.94 U5.1@-298.29,-339.66 ; R14.2@-295.91,-408.69 R14.2 -295.55,-409.35 -295.55,-456.55 v2(-295.7,-456.7)
  Bottom Layer w10: v2(-1359.6,-860.05) -1389.55,-890 -1389.55,-1358.8 -1342.05,-1406.3 v2(-1141.1,-1406.3) -1141.1,-1306.25 -1037.2,-1202.35 -919.3,-1202.35 -782.8,-1065.85 -602.9,-1065.85 -297.05,-760 v2@-297.05,-456.25
pads on no net: CARD1.C6 ML1.2 ML1.3 ML1.4 ML1.5 ML1.6 ML1.8 ML1.9 ML1.16 ML1.19 ML1.20 ML1.21 ML1.22 ML1.23 ML1.25 ML1.26 ML1.28 ML1.29 ML1.30 ML1.31 ML1.32 ML1.33 ML1.44 ML1.49 ML1.50 ML1.51 ML1.52 ML1.53 ML1.54 ML1.55 ML1.56 ML1.57 ML1.58 ML1.62 ML1.63 ML1.64 ML1.65 ML1.66 ML1.67 ML1.68 ML1.69 ML1.74 ML1.75 ML1.76 ML1.77 ML1.78 ML1.80 ML1.81 ML1.83 ML1.84 ML1.85 ML1.86 ML1.87 ML1.96 ML1.97 ML1.98 ML1.99 ML1.100 ML1.101 ML1.102 ML1.103 ML1.104 ML1.105 ML1.106 ML1.107 ML1.108 ML1.109

## Polygon pours and split planes (outlines as drawn)
NGND on Top Layer "NONET_L-01_P-001" (solid, remove dead copper, pour order 10): -172.94,400.51 -1599.2,400.51 -1599.2,149.1 -1639.9,108.4 -1639.9,-1590.3 -1601.7,-1628.5 183.55,-1628.5 220.75,-1591.3 220.17,-1590.72 220.17,-959.77 199.75,-939.35 -247.9,-939.35 -266.35,-920.9 -266.35,-866.7 -288.5,-844.55 -288.5,-724.1 -187.95,-623.55 -187.95,-137.15 -170.75,-119.95
GND on Top Layer "NONET_L-01_P-001" (solid, remove dead copper, pour order 9): -136.46,379.84 -157.45,349.4 -157.45,-126.66 -175.44,-144.65 -175.44,-608.15 -181.89,-614.6 -181.89,-644.5 -183.89,-644.5 -282.49,-743.1 -282.49,-837.05 -202.29,-917.25 196.91,-917.25 213.06,-901.1 213.06,351.48 185.59,378.95
no net on Top Layer "NONET_L-01_P-001" (solid, pour order 4): 1653.23,-179.55
NGND on Bottom Layer "NONET_L-01_P-001" (solid, remove dead copper, pour order 8): -177.53,384.46 -1610.96,384.46 -1610.96,150.91 -1651.66,110.21 -1651.66,-1588.49 -1613.46,-1626.69 171.79,-1626.69 208.99,-1589.49 208.41,-1588.91 208.41,-957.96 187.99,-937.54 -259.66,-937.54 -278.11,-919.09 -278.11,-864.89 -300.26,-842.74 -300.26,-722.29 -199.71,-621.74 -199.71,-135.34 -175.44,-111.07
GND on Bottom Layer "NONET_L-01_P-001" (solid, remove dead copper, pour order 6): -135.61,391.72 -156.6,361.28 -156.6,-114.78 -174.59,-132.77 -174.59,-596.27 -181.04,-602.72 -181.04,-632.62 -183.04,-632.62 -281.64,-731.22 -281.64,-837.41 -203.7,-915.35 198.45,-915.35 213.91,-899.89 213.91,363.36 186.44,390.83

## Keep-outs
Keep-Out Layer:
  lines w2: -1469.92,-1563.97 ccw(c-1399.63,-1561.6) -1397.25,-1631.88 ; -1469.92,-144.93 -1058.35,-144.45 -1058.57,310.57 cw(c-988.3,312.95) -988.86,383.26 ; 147.95,-1631.87 ccw(c149.87,-1564.27) 217.47,-1566.2 ; 154.85,383.17 cw(c147.51,312.61) 217.96,320.9
  lines w2.95: -1469.92,-1563.97 -1469.92,-144.93 ; -1399.63,-1631.92 147.95,-1631.87 ; -988.86,383.17 154.85,383.17 ; 217.47,-1566.2 217.96,320.9

## Other copper
Top Layer:
  region net GND: -169.25,-326.85 -165.75,-330.35 -102.8,-330.35 -96.5,-324.05 -96.5,161.4 -60.45,197.45 -60.45,259.89 -78.02,278.05 -111.1,278.3 -151.65,237.8 -151.65,-202.4 -169.25,-220
  region net +5V: 35.75,-3.57 35.8,270 27.85,277.95 -25.3,277.95 -31.3,271.95 -31.3,32.4 -31.05,-162.6 -58.6,-190.15 -58.6,-320 -93.2,-354.6 -93.2,-389.6 -38.55,-389.6 -28.25,-379.3 -28.25,-357.85 -8.65,-357.85 35.75,-313.45
  region net VBAT: -466.55,-1059.35 -302.6,-1059.35 -284.35,-1077.6 -70.05,-1077.6 -60.25,-1067.8 -60.25,-955.15 -71.35,-944.05 -72.65,-945.35 -130,-945.35 -130,-976.6 -169.75,-1016.35 -511,-1016.35 -519.45,-1024.8 -606.85,-1024.8 -619.53,-1037.48 -619.53,-1091.72 -613.64,-1097.61 -504.81,-1097.61
  pour cut-out: -650.5,-1469.1 -655.75,-1453.4 -162.95,-1453.4 -155.1,-1453.4 -154.25,-1454.25 -154.25,-1528.75 -650.05,-1528.75 -659.65,-1519.15
  pour cut-out: -13.31,-525.15 -111.25,-525.15 -112.45,-526.35 -110.95,-527.85 -110.95,-654.5 -14.8,-654.5 -14.55,-654.75
  region net NGND: -1011.95,-1106.35 -1012.5,-1106.9 -1012.5,-1228.05 -761.2,-1228.05 -714.65,-1181.5 -660.8,-1181.5 -658.55,-1179.25 -658.55,-1058.1 -711.8,-1058.1 -749.1,-1020.8 -764.6,-1020.8 -764.6,-1066.55 -805.35,-1106.35
  region net GND: -228.7,-687.5 -278.05,-736.85 -278.05,-830.8 -234.95,-873.9 -235.35,-874.3 -235.35,-923.35 -171.5,-923.35 -149.3,-901.15 -149.3,-694.95 -157.9,-686.35
  region net NetC3_1: -108.4,-611.4 -107.9,-611.9 -107.9,-677.1 -96.1,-688.9 -96.1,-785.4 -126.35,-815.65 -126.35,-908.5 -124.8,-910.05 -50.9,-910.05 -21.7,-880.85 -21.7,-612.4
  region net NetL1_1: -86.05,-444 -110.8,-468.75 -110.8,-567.4 -20.45,-567.4 -20.45,-525.15 -20.45,-463 -39.15,-444.3
  region: -53.4,-923.8
  region: 12.55,-919.4
Multi-Layer:
  pour cut-out: -884.5,85.59 cw(c-884.5,223.39) -1022.29,223.39 cw(c-884.5,223.39) -884.5,361.18 cw(c-884.5,223.39) -746.7,223.39 cw(c-884.5,223.39)
  pour cut-out: -93.79,-1436.01 ccw(c44,-1436.01) 44,-1573.81 ccw(c44,-1436.01) 181.8,-1436.01 ccw(c44,-1436.01) 44,-1298.22 ccw(c44,-1436.01)

## Silkscreen, mask and mechanical layers (free items; w line width, h text height)
Top Overlay:
  circle w10: c-884.3,223.52 r137.8
  circle w10: c44.47,-1435.05 r137.8
Bottom Overlay:
  text "ZC-ST4X-A004F" at 56.35,-574.49 h100
  text "20251211" at 52.1,-668.14 h100
Mechanical 1:
  circle w10: c-884.3,223.52 r66.93
  circle w10: c44.47,-1435.05 r66.93
  lines w2.95: -1469.92,-1561.92 -1469.92,-144.93 ; -1468.8,-144.93 -1058.47,-144.93 ; -1398.61,-1631.92 151.07,-1631.92 ; -1058.47,-143.85 -1058.47,312.95 ; -988.3,383.17 147.98,383.17 ; 217.98,-1561.92 217.98,313.05
  lines w3: -1469.63,-1561.6 ccw(c-1399.63,-1561.6) -1399.63,-1631.6 ; -1058.3,312.95 cw(c-988.3,312.95) -988.3,382.95 ; 147.98,-1631.92 ccw(c147.98,-1561.92) 217.98,-1561.92 ; 147.98,383.05 cw(c147.98,313.05) 217.98,313.05